# EAGLE board t (EAGLE 7.1.0)
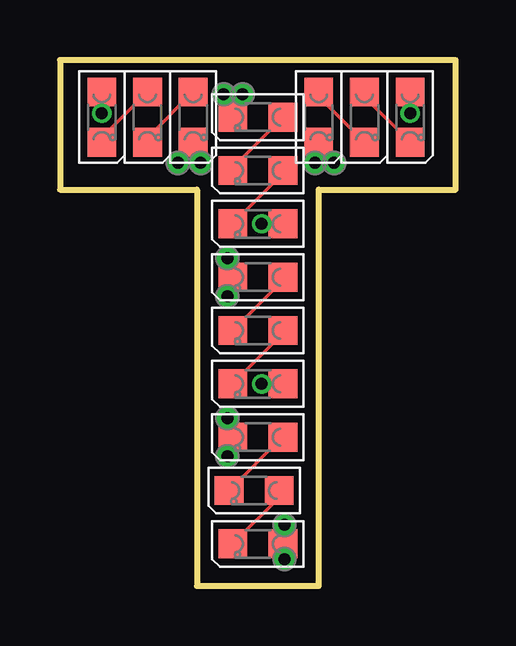
[diagram p0: board, top side]
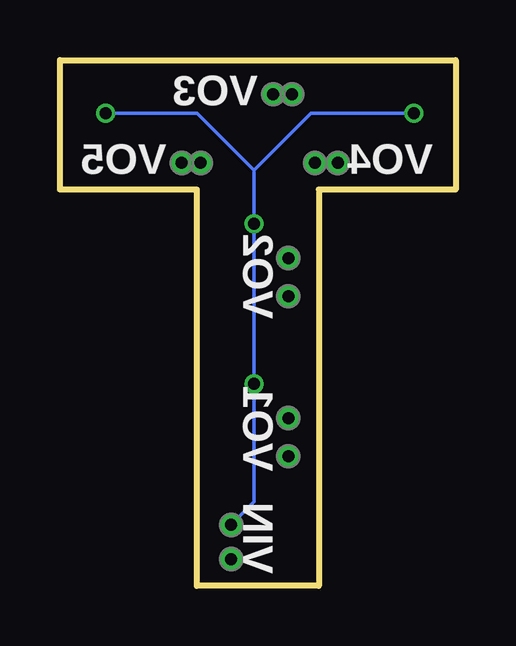
[diagram p1: board, bottom side, seen from below]

Size 16.51 x 21.91 mm. Coordinates in mm from the lower left corner, seen from the top.
Outline: 0,21.91 0,16.51 5.71,16.51 5.71,0 10.79,0 10.79,16.51 16.51,16.51 16.51,21.91 0,21.91
Copper layers (1*16): Top 0.035mm / dielectric 1.5mm / Bottom 0.035mm
Design rules "Fusion_eagle_rule_v1.1_tms *": minimum track width 6mil, minimum drill 12mil, track to track 6mil, track to pad 6mil, pad to pad 6mil, via to via 6mil, smd to smd 0mil, copper to edge 10mil, drill to drill 10mil, minimum pad ring 10mil, minimum via ring 6mil, stop-mask expansion 2mil, vias tented up to drill 100mil, thermal gap 10mil

## Footprints (pad centres in the part's own frame; a part is rotated, then mirrored left to right if it is on the bottom)
LED_0805 = smd 1.2 x 1.2: A 0,-1.05; C 0,1.05
P1-20 = drill 0.5: TP 0,0

## Placement (x,y rotation side)
LED1  [LED_0805]  8.26,1.75 90 top
LED2  [LED_0805]  8.1,3.97 90 top
LED3  [LED_0805]  8.26,6.19 90 top
LED4  [LED_0805]  8.26,8.41 90 top
LED5  [LED_0805]  8.26,10.64 90 top
LED6  [LED_0805]  8.26,12.86 90 top
LED7  [LED_0805]  8.26,15.08 90 top
LED8  [LED_0805]  8.26,17.3 90 top
LED9  [LED_0805]  8.26,19.53 90 top
LED10  [LED_0805]  1.75,19.53 180 top
LED11  [LED_0805]  3.65,19.53 180 top
LED12  [LED_0805]  5.56,19.53 180 top
LED13  [LED_0805]  10.79,19.53 180 top
LED14  [LED_0805]  12.7,19.53 180 top
LED15  [LED_0805]  14.61,19.53 180 top
VIN  [P1-20]  9.37,1.11 0 top
VIN1  [P1-20]  9.37,2.54 0 top
VO1  [P1-20]  6.99,5.4 0 top
VO2  [P1-20]  6.99,12.07 0 top
VO3  [P1-20]  6.83,20.48 0 top
VO4  [P1-20]  4.92,17.62 0 top
VO5  [P1-20]  10.64,17.62 0 top
VO6  [P1-20]  6.99,6.99 0 top
VO7  [P1-20]  6.99,13.65 0 top
VO8  [P1-20]  7.62,20.48 0 top
VO9  [P1-20]  5.87,17.62 0 top
VO10  [P1-20]  11.43,17.62 0 top

## Library data of the parts
LED1-LED15 VIN VIN1 VO1-VO10 = CyberRailGuru

## Nets
N$1: LED13.A LED14.C
N$2: LED14.A LED15.C
N$65: LED2.C LED3.A
N$66: LED1.C LED2.A
N$67: LED5.C LED6.A
N$68: LED4.C LED5.A
N$69: LED8.C LED9.A
N$70: LED7.C LED8.A
N$71: LED11.C LED12.A
N$72: LED10.C LED11.A
VIN: LED1.A LED4.A LED7.A LED10.A LED15.A VIN1.TP VIN.TP
VOUT1: LED3.C VO1.TP VO6.TP
VOUT2: LED6.C VO2.TP VO7.TP
VOUT3: LED9.C VO3.TP VO8.TP
VOUT4: LED12.C VO4.TP VO9.TP
VOUT5: LED13.C VO5.TP VO10.TP

## Tracks (layer width: path | path; a pad name or v marks a point on that pad's centre or on a via)
N$1
  Top 0.152: LED13.A 10.79,20.38 LED14.C
N$2
  Top 0.152: LED14.A 12.7,20.38 LED15.C
N$65
  Top 0.152: LED3.A 9.27,6.19 LED2.C
N$66
  Top 0.152: LED2.A 9.15,3.69 LED1.C
N$67
  Top 0.152: LED6.A 9.3,12.74 LED5.C
N$68
  Top 0.152: LED5.A 9.3,10.51 LED4.C
N$69
  Top 0.152: LED8.C 7.21,17.43 LED9.A
N$70
  Top 0.152: LED8.A 9.3,17.18 LED7.C
N$71
  Top 0.152: LED11.C 3.65,18.67 LED12.A
N$72
  Top 0.152: LED10.C 1.75,18.67 LED11.A
VIN  (via drill 0.5)
  Top 0.152: VIN1.TP 9.3,2.54 LED1.A 9.3,1.11 VIN.TP | v8.41,8.41 LED4.A | LED7.A v8.41,15.08 | LED10.A v1.75,19.68 | LED15.A v14.61,19.68
  Bottom 0.152: v1.75,19.68 6.03,19.68 8.41,17.3 | 8.41,17.3 v8.41,15.08 v8.41,8.41 8.41,3.49 VIN1.TP | v14.61,19.68 10.79,19.68 8.41,17.3
VOUT1
  Top 0.152: 6.99,6.19 VO6.TP | LED3.C 6.99,6.19 | 6.99,6.19 VO1.TP
VOUT2
  Top 0.152: LED6.C 6.99,12.86 VO7.TP VO2.TP
VOUT3
  Top 0.152: 7.14,19.62 LED9.C 6.83,19.75 VO3.TP VO8.TP
VOUT4
  Top 0.152: LED12.C 5.87,18.48 VO9.TP VO4.TP
VOUT5
  Top 0.152: LED13.C 10.64,18.48 VO5.TP VO10.TP

## Text on the board
201bmp: T